# EAGLE board reference - MJ838 - rev.1b (EAGLE 9.6.2), part 1 of 2
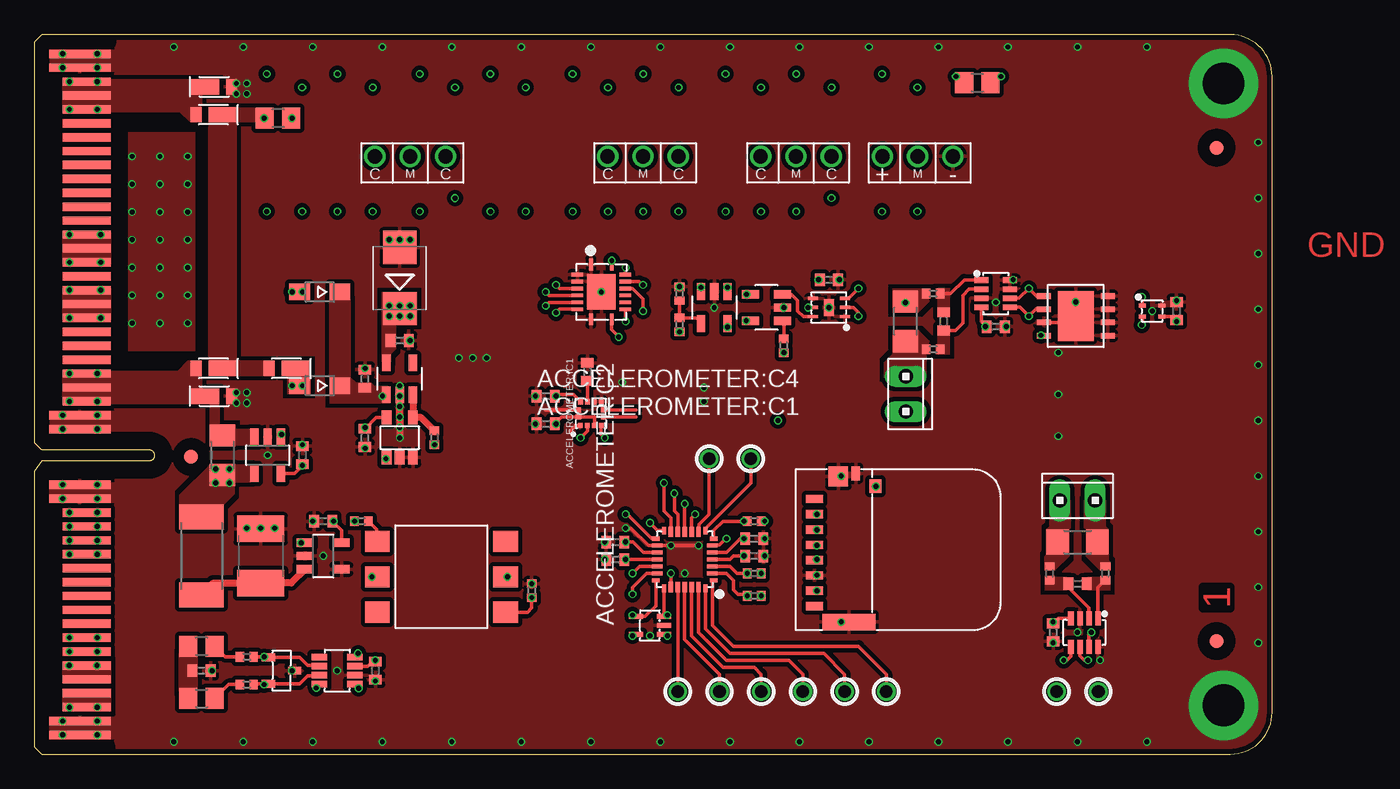
[diagram p0: board, top side]
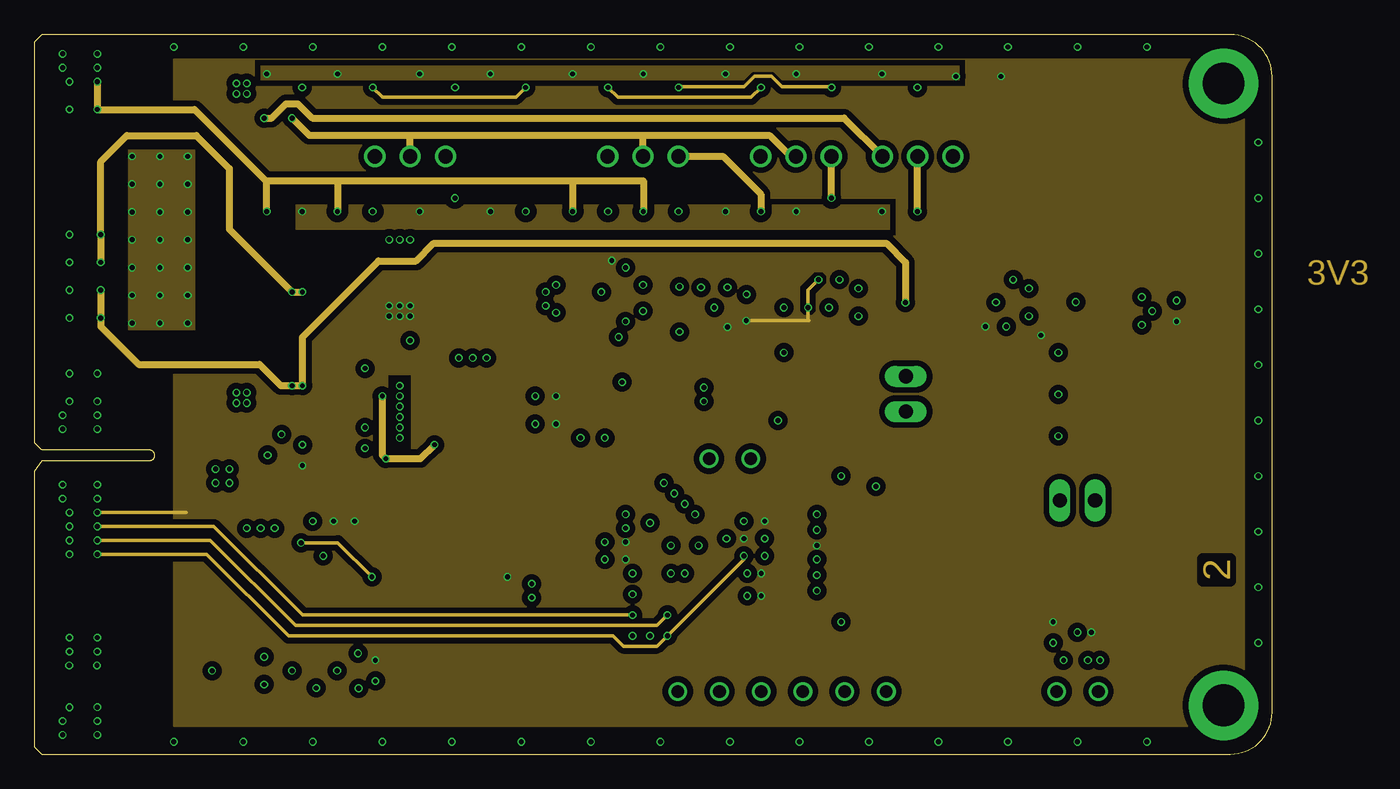
[diagram p1: board, inner layer Route2]
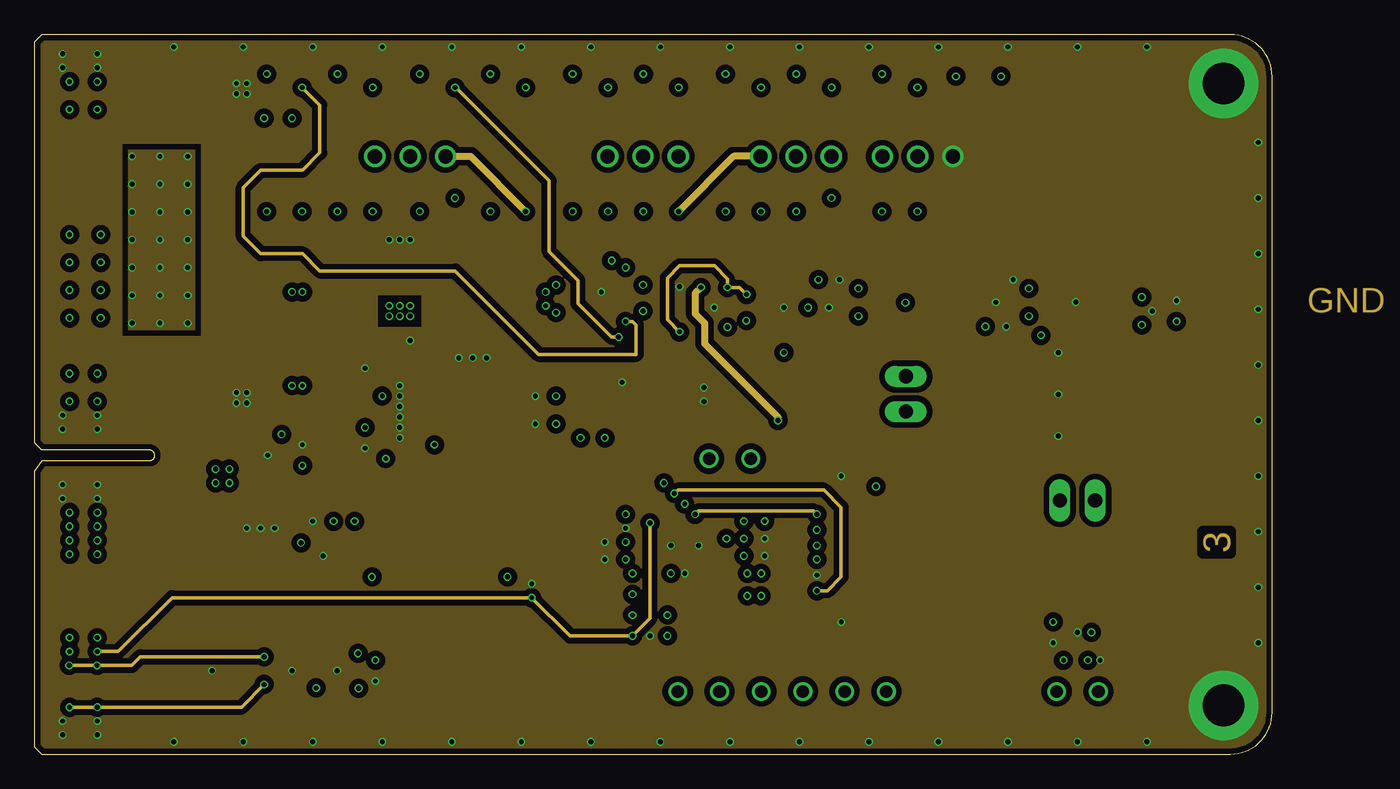
[diagram p2: board, inner layer Route3]
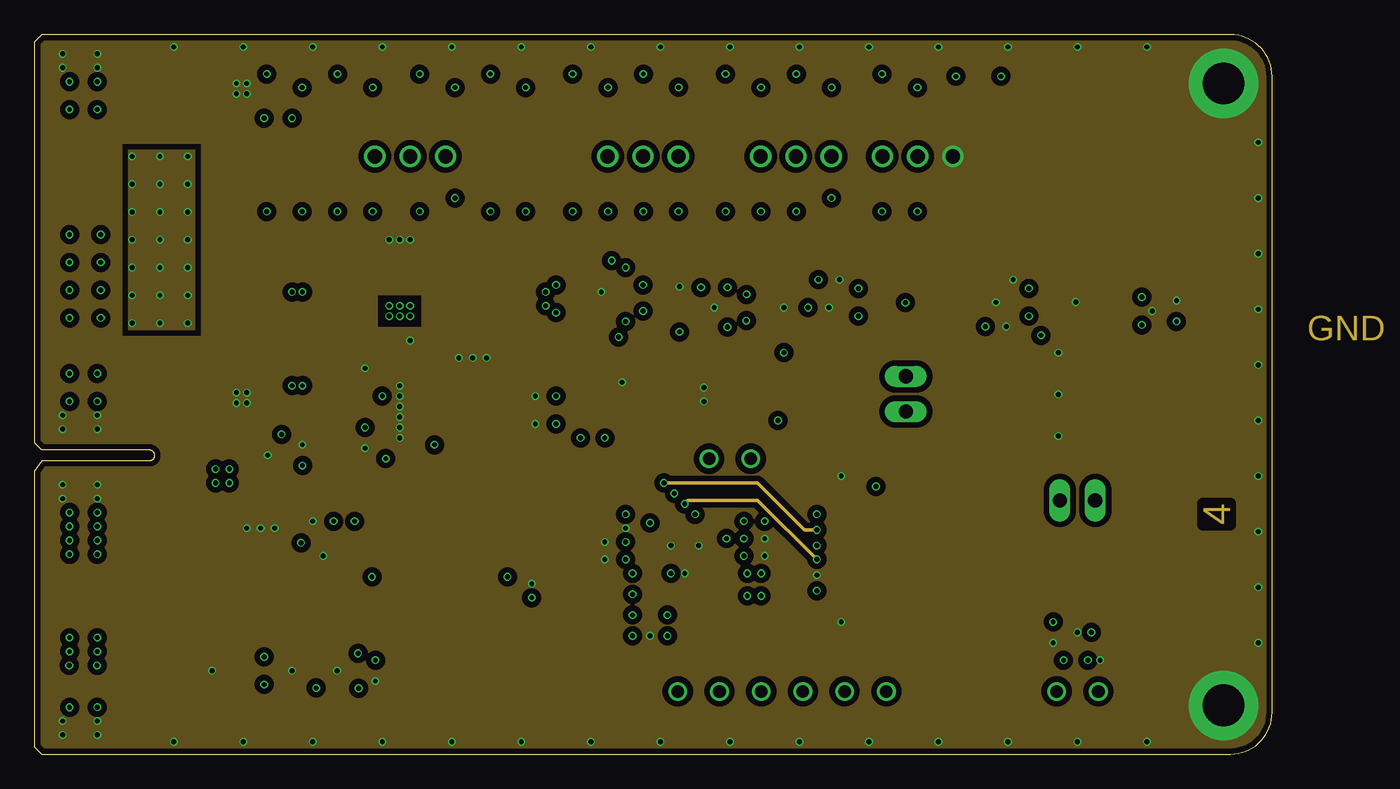
[diagram p3: board, inner layer Route14]
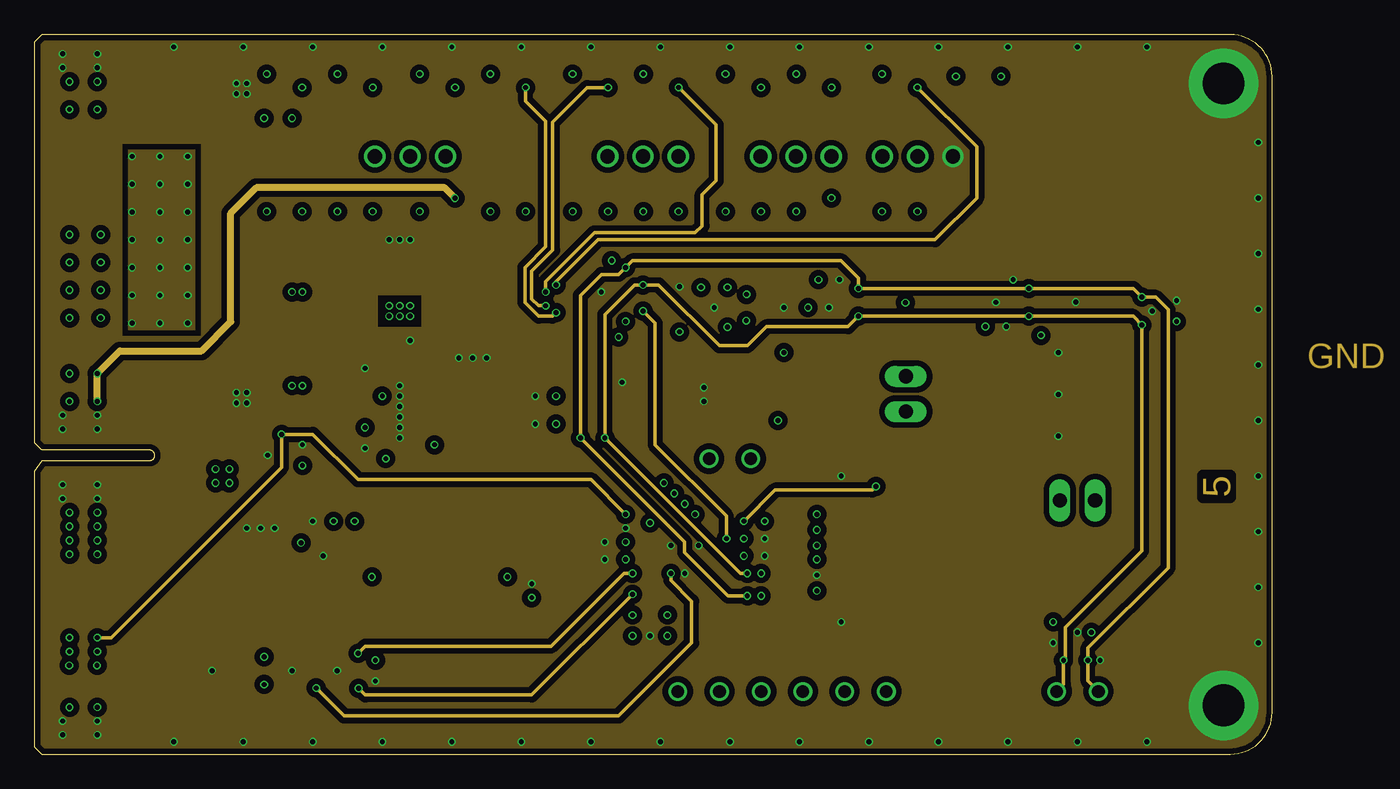
[diagram p4: board, inner layer Route15]
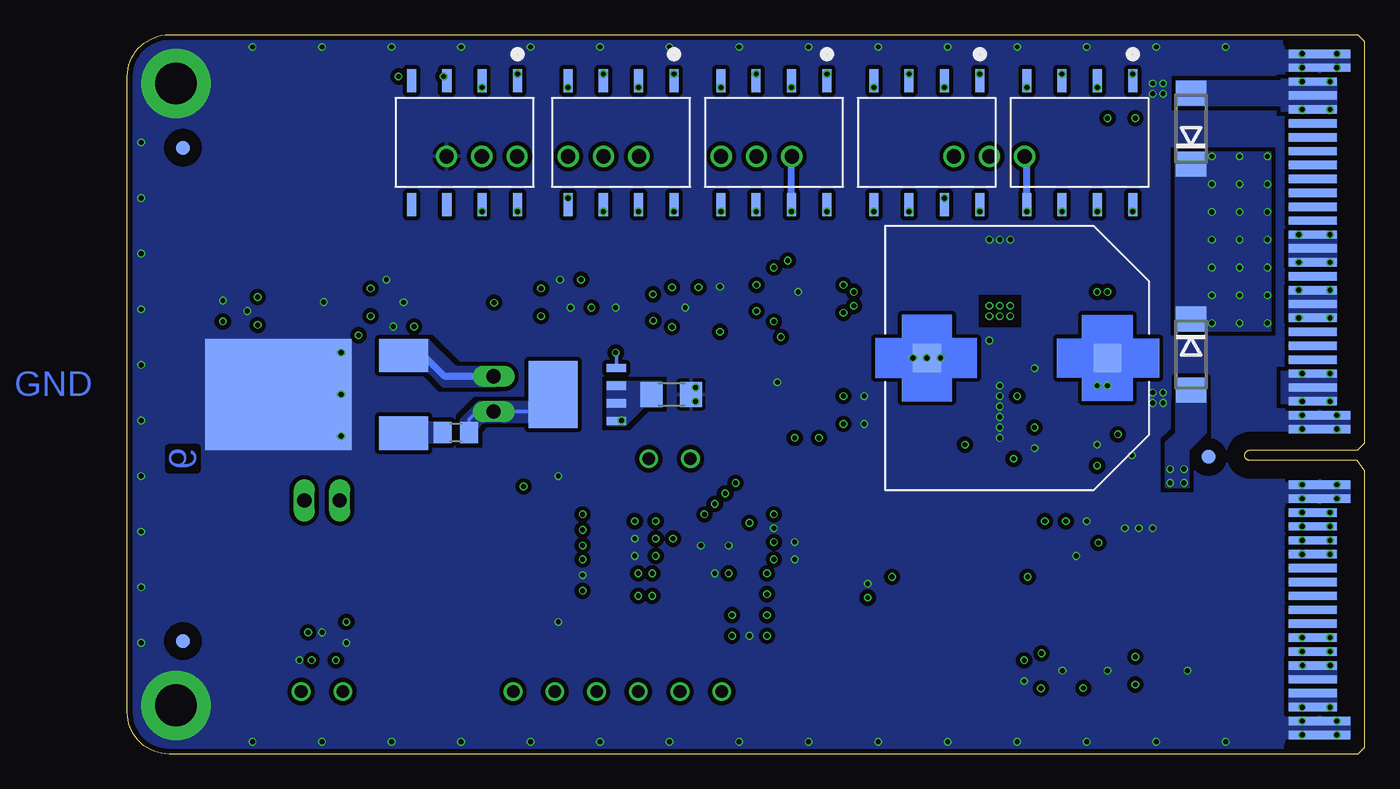
[diagram p5: board, bottom side, seen from below]

Size 89 x 51.75 mm. Coordinates in mm from the lower left corner, seen from the top.
Outline: 0.5,0 0,0.5 0,20.38 0.55,21.12 8.3,21.12 arc90 8.62,21.48 arc90 8.25,21.88 0.5,21.88 0,22.38 0,51.25 0.5,51.75 86,51.75 arc-90 89,48.75 89,3 arc-90 86,0 0.5,0
Copper layers (1*2*3*14*15*16): Top 0.0432mm / dielectric 0.1107mm / Route2 0.0175mm / dielectric 4mil / Route3 0.0175mm / dielectric 0.925575mm / Route14 0.0175mm / dielectric 4mil / Route15 0.0175mm / dielectric 0.1107mm / Bottom 0.0432mm
Design rules "oshpark-6layer": minimum track width 5mil, minimum drill 8mil, track to track 5mil, track to pad 5mil, pad to pad 5mil, via to via 5mil, smd to smd 5mil, copper to edge 15mil, drill to drill 6mil, minimum pad ring 4mil, minimum via ring 4mil, stop-mask expansion 1.5mil, vias tented up to drill 0mil, thermal gap 10mil
Net classes: 0 GND: width 0.25 mm, drill 0.35 mm, clearance 0.19 mm; 1 BAT+: width 0.5 mm, drill 0.35 mm, clearance 0.5 mm to class 0, clearance 0.5 mm; 2 signal: width 0.25 mm, drill 0.35 mm, clearance 0.19 mm to class 0, clearance 0.19 mm to class 1, clearance 0.19 mm; 3 3V3: width 0.25 mm, drill 0.35 mm, clearance 0.19 mm to class 0, clearance 0.19 mm to class 1, clearance 0.19 mm to class 2, clearance 0.19 mm; 4 Vdc: width 0.5 mm, drill 0.35 mm, clearance 0.5 mm to class 0, clearance 0.5 mm to class 1, clearance 0.5 mm to class 2, clearance 0.5 mm to class 3, clearance 0.5 mm; 5 Vdynamo: width 0.5 mm, drill 0.35 mm, clearance 0.5 mm to class 0, clearance 0.5 mm to class 1, clearance 0.5 mm to class 2, clearance 0.5 mm to class 3, clearance 0.5 mm to class 4, clearance 0.5 mm; 6 Vac: width 0.5 mm, drill 0.35 mm, clearance 0.5 mm to class 0, clearance 0.5 mm to class 1, clearance 0.5 mm to class 2, clearance 0.5 mm to class 3, clearance 0.5 mm to class 4, clearance 0.5 mm to class 5, clearance 0.5 mm

## Footprints (pad centres in the part's own frame; a part is rotated, then mirrored left to right if it is on the bottom)
C0402 = smd 0.7 x 0.9: 1 -0.65,0; 2 0.65,0
WSON-6 = smd 0.25 x 0.75: 1 -0.65,-1.15; 2 0,-1.15; 3 0.65,-1.15; 4 0.65,1.15; 5 0,1.15; 6 -0.65,1.15 | smd 1.2 x 0.75: 7 0,0
SOT-23-5 = smd 0.6 x 1.2: 1 0.95,1.15; 2 0,1.15; 3 -0.95,1.15; 4 -0.95,-1.15; 5 0.95,-1.15
SOT669 = smd 4.826 x 3.5: D 0,1.755 | smd 0.6 x 1.4: G 1.9,-2.8; S1 -1.91,-2.8; S2 -0.64,-2.8; S3 0.63,-2.8
10X02MTA = drill 1.016 long: 1 1.27,0; 2 -1.27,0
R0402 = smd 0.6 x 0.7: 1 -0.5,0; 2 0.5,0
R1206 = smd 1.6 x 1.803: 1 -1.422,0; 2 1.422,0
TO-263-2 = smd 2.4 x 3.5: 1 -2.8,1.75; 2 2.8,1.75 | smd 8 x 10.52: DIE 0,10.75
R0805 = smd 1.3 x 1.5: 1 -0.95,0; 2 0.95,0
LGA-12 = smd 0.39 x 0.33: 1_SCLK -0.863,0.755; 2_MOSI/SDA -0.863,0.255; 3_MISO/ASEL -0.863,-0.245; 4_!CS!/SCL -0.863,-0.745; 7_GND 0.858,-0.757; 8_ADC_IN 0.858,-0.258; 9_VREG_OUT 0.858,0.242; 10_VS 0.858,0.743 | smd 0.33 x 0.39: 5_INT1 -0.25,-0.912; 6_INT2 0.25,-0.912; 11_GND 0.25,0.91; 12_VDDIO -0.25,0.91
SOT23-8 = smd 0.45 x 1.1: P$1 -0.975,-1.275; P$2 -0.325,-1.275; P$3 0.325,-1.275; P$4 0.975,-1.275; P$5 0.975,1.275; P$6 0.325,1.275; P$7 -0.325,1.275; P$8 -0.975,1.275
SOT-23-3 = smd 0.56 x 0.95: 1 -0.95,-0.95; 2 0.95,-0.95; 3 0,0.95
SMD = smd 4.45 x 0.6: 1 0,24.5; 3 0,23.5; 35 0,7.5; 37 0,6.5; 45 0,2.5; 47 0,1.5; 97 0,-23.5; 99 0,-24.5 | smd 4.45 x 0.6 bottom: 2 0,24.5; 4 0,23.5; 36 0,7.5; 38 0,6.5; 46 0,2.5; 48 0,1.5; 98 0,-23.5; 100 0,-24.5 | smd 3.45 x 0.6: 5 0.5,22.5; 7 0.5,21.5; 9 0.5,20.5; 11 0.5,19.5; 13 0.5,18.5; 15 0.5,17.5; 17 0.5,16.5; 19 0.5,15.5; 21 0.5,14.5; 23 0.5,13.5; 25 0.5,12.5; 27 0.5,11.5; 29 0.5,10.5; 31 0.5,9.5; 33 0.5,8.5; 49 0.5,0.5; 51 0.5,-0.5; 53 0.5,-1.5; 55 0.5,-2.5; 57 0.5,-3.5; 59 0.5,-4.5; 61 0.5,-5.5; 63 0.5,-6.5; 65 0.5,-7.5; 67 0.5,-8.5; 69 0.5,-9.5; 71 0.5,-10.5; 73 0.5,-11.5; 75 0.5,-12.5; 77 0.5,-13.5; 79 0.5,-14.5; 81 0.5,-15.5; 83 0.5,-16.5; 85 0.5,-17.5; 87 0.5,-18.5; 89 0.5,-19.5; 91 0.5,-20.5; 93 0.5,-21.5; 95 0.5,-22.5 | smd 3.45 x 0.6 bottom: 6 0.5,22.5; 8 0.5,21.5; 10 0.5,20.5; 12 0.5,19.5; 14 0.5,18.5; 16 0.5,17.5; 18 0.5,16.5; 20 0.5,15.5; 22 0.5,14.5; 24 0.5,13.5; 26 0.5,12.5; 28 0.5,11.5; 30 0.5,10.5; 32 0.5,9.5; 34 0.5,8.5; 50 0.5,0.5; 52 0.5,-0.5; 54 0.5,-1.5; 56 0.5,-2.5; 58 0.5,-3.5; 60 0.5,-4.5; 62 0.5,-5.5; 64 0.5,-6.5; 66 0.5,-7.5; 68 0.5,-8.5; 70 0.5,-9.5; 72 0.5,-10.5; 74 0.5,-11.5; 76 0.5,-12.5; 78 0.5,-13.5; 80 0.5,-14.5; 82 0.5,-15.5; 84 0.5,-16.5; 86 0.5,-17.5; 88 0.5,-18.5; 90 0.5,-19.5; 92 0.5,-20.5; 94 0.5,-21.5; 96 0.5,-22.5
SMB = smd 2.4 x 2.4: A 2.2,0; C -2.2,0
DFN8 = smd 1 x 0.4: 1 -2.3,1.425; 2 -2.3,0.475; 3 -2.3,-0.475; 4 -2.3,-1.425; 5 2.3,-1.425; 6 2.3,-0.475; 7 2.3,0.475; 8 2.3,1.425 | smd 2.6 x 3.6: G 0,0
FIDUCIAL_1MM = smd 1 x 1: 1 0,0
SMD' = smd 0.5 x 0.3: SCL -0.7,-0.4; SDA -0.7,0.4; VDD 0.7,-0.4; VSS 0.7,0.4
SOT323-5 = smd 1 x 0.35: GND -1,0; I1 -1,0.65; I2 -1,-0.65; I3 1,-0.65; I4 1,0.65
SOT-23-8 = smd 1 x 0.4: P$1 -1.025,0.975; P$2 -1.025,0.325; P$3 -1.025,-0.325; P$4 -1.025,-0.975; P$5 1.025,-0.975; P$6 1.025,-0.325; P$7 1.025,0.325; P$8 1.025,0.975
SOT23-5 = smd 0.7 x 1: 1_VDD -0.95,-1.4; 2_GND 0,-1.4; 3_GND 0.95,-1.4; 4_DOUT 0.95,1.45; 5_CD -0.95,1.45
SOT-23-5L = smd 0.6 x 1.2: ADJ/NC -0.95,-1.15; EN -0.95,1.15; GND 0,1.15; IN 0.95,1.15; OUT 0.95,-1.15
SOD323-W = smd 1.5 x 1.2: A 1.45,0; C -1.45,0
US2H = smd 2 x 1.1: A -1,0 | smd 0.8 x 1.1: C 0.9,0
TH-2S = drill 1.016: 1_POS -2.54,0; 2_MID 0,0; 3_NEG 2.54,0
SMD_DIP8 = smd 0.65 x 1.65: 1_ANODE1 -3.81,-4.44; 2_CATHODE1 -1.27,-4.44; 3_ANODE2 1.27,-4.44; 4_CATHODE2 3.81,-4.44; 5_DRAIN2-1 3.81,4.48; 6_DRAIN2-2 1.27,4.48; 7_DRAIN1-1 -1.27,4.48; 8_DRAIN1-2 -3.81,4.48
VQFN16 = smd 0.85 x 0.28: 1 -1.975,-0.75; 8 1.975,-0.75; 9 1.975,0.75; 16 -1.975,0.75 | smd 0.28 x 0.85: 2 -1.25,-1.725; 3 -0.75,-1.725; 4 -0.25,-1.725; 5 0.25,-1.725; 6 0.75,-1.725; 7 1.25,-1.725; 10 1.25,1.725; 11 0.75,1.725; 12 0.25,1.725; 13 -0.25,1.725; 14 -0.75,1.725; 15 -1.25,1.725 | smd 2.55 x 2.05: 17 0,0
TH-2S-BACK-TO-BACK = drill 1.016: 1_C -2.54,0; 2_MID 0,0; 3_C 2.54,0
DO214AA = smd 1.8 x 2.2: A 2.55,0; C -2.55,0
SOT23-5' = smd 0.6 x 1.2: 1 -0.95,-1.306; 2 0,-1.306; 3 0.95,-1.306; 4 0.95,1.306; 5 -0.95,1.306
CAP_EEEFK1E472SV = smd 2 x 2: + -6.5,0; - 6.5,0
C1812 = smd 1.9 x 3.4: 1 -1.95,0; 2 1.95,0
SMD-6 = smd 1.78 x 1.52: 1 -4.61,2.54; 2 -4.61,0; 3 -4.61,-2.54; 4 4.61,-2.54; 5 4.61,0; 6 4.61,2.54
R2512 = smd 1.8 x 3.2: 1 -2.8,0; 2 2.8,0
MICRO_SD_CONNECTOR = smd 0.6 x 1.25: CD/DAT3 2.75,-1.33; CLK -0.55,-1.33; CMD 1.65,-1.33; DAT0 -2.75,-1.33; DAT1 -3.85,-1.33; DAT2 3.85,-1.33; GND3 -1.65,-1.33; VDD 0.55,-1.33 | smd 0.95 x 0.85: DET 4.775,-5.723 | smd 1.2 x 3.79: GND1 -5,-3.81 | smd 1.45 x 1.4: GND2 5.475,-3.05 | smd 1 x 0.6: POL 5.7,-4.3
UFQFPN-28 = smd 0.55 x 0.3: 1_PB8 -2.08,1.5; 7_PA1 -2.08,-1.5; 15_PB1 2.08,-1.5; 21_PA13 2.08,1.5 | smd 0.75 x 0.3: 2_PF0 -1.98,1; 3_PF1 -1.98,0.5; 4_NRST -1.98,0; 5_VDDA -1.98,-0.5; 6_PA0 -1.98,-1; 16_VSS 1.98,-1; 17_VDD 1.98,-0.5; 18_VDDIO2 1.98,0; 19_PA9-[PA11] 1.98,0.5; 20_PA10-[PA12] 1.98,1 | smd 0.3 x 0.55: 8_PA2 -1.5,-2.08; 14_PB0 1.5,-2.08; 22_PA14 1.5,2.08; 28_PB7 -1.5,2.08 | smd 0.3 x 0.75: 9_PA3 -1,-1.98; 10_PA4 -0.5,-1.98; 11_PA5 0,-1.98; 12_PA6 0.5,-1.98; 13_PA7 1,-1.98; 23_PA15 1,1.98; 24_PB3 0.5,1.98; 25_PB4 0,1.98; 26_PB5 -0.5,1.98; 27_PB6 -1,1.98
TH-0.9 = drill 0.9: P$1 0,0

## Placement (x,y rotation side)
12R_OHMIC_LOAD:C1  0.1uF / 10V  [C0402]  57.12,34.12 180 top
12R_OHMIC_LOAD:IC1  DAC121C081CISD/NOPB  [WSON-6]  57.12,32.12 90 top
12R_OHMIC_LOAD:IC2  AD8515ARTZ-REEL7  [SOT-23-5]  52.62,32.12 270 top
12R_OHMIC_LOAD:IC3  PH2925U,115  [SOT669]  56.62,25.88 90 bottom
12R_OHMIC_LOAD:IC4  AD8515ARTZ-REEL7  [SOT-23-5]  48.88,32.12 0 top
12R_OHMIC_LOAD:J3  Application  [10X02MTA]  62.65,25.91 270 top
12R_OHMIC_LOAD:R1  3k  [R0402]  46.38,33.12 270 top
12R_OHMIC_LOAD:R2  0.1R / 0.5W - LVK12R100CER  [R1206]  49.88,25.88 180 bottom
12R_OHMIC_LOAD:R3  1k  [R0402]  53.88,29.38 270 top
12R_OHMIC_LOAD:R4  27k  [R0402]  46.38,30.88 270 top
12R_OHMIC_LOAD:R5  12R, 20W, AP725 12R F  [TO-263-2]  67.38,25.88 90 bottom
12R_OHMIC_LOAD:R6  0  [R0805]  65.38,23.12 180 bottom
ACCELEROMETER:C1  0.1uF / 10V  [C0402]  36.75,23.75 0 top
ACCELEROMETER:C2  0.2uF / 10V  [C0402]  39.75,27.5 270 top
ACCELEROMETER:C4  0.11uF / 10V  [C0402]  36.75,25.75 0 top
ACCELEROMETER:IC1  ADXL367BCCZ-RL7  [LGA-12]  40,24.5 90 top
CAN_INFRA:C1  47nF / 10V  [C0402]  12,6 0 top
CAN_INFRA:C5  0.1uF / 10V  [C0402]  24.5,6 270 top
CAN_INFRA:IC1  TCAN334GDCNT  [SOT23-8]  21.75,6 90 top
CAN_INFRA:IC2  SZNUP2105LT1G  [SOT-23-3]  17.75,6 270 top
CAN_INFRA:R1  60R, 0.5W  [R0805]  12,7.75 180 top
CAN_INFRA:R2  60R, 0.5W  [R0805]  12,4 0 top
CAN_INFRA:R3  0  [R0402]  15.25,5 0 top
CAN_INFRA:R4  0  [R0402]  15.25,7 0 top
CONN1  MEC1-150-02-F-D-RA1-SL  [SMD]  3.25,25.88 180 bottom
D1  SMLVT3V3  [SMB]  26.25,34.25 90 top
FE-RAM:IC1  FM24CL64B-DGTR  [DFN8]  74.88,31.52 180 top
FID1  n/a  [FIDUCIAL_1MM]  11.25,21.38 180 top
FID2  n/a  [FIDUCIAL_1MM]  85,8.12 0 bottom
FID3  n/a  [FIDUCIAL_1MM]  85,8.12 180 top
FID4  n/a  [FIDUCIAL_1MM]  11.25,21.38 0 bottom
FID5  n/a  [FIDUCIAL_1MM]  85,43.62 180 top
FID6  n/a  [FIDUCIAL_1MM]  85,43.62 0 bottom
HUMIDITY_SENSOR:C5  0.1uF / 10V  [C0402]  82.12,31.88 90 top
HUMIDITY_SENSOR:IC1  SHT40-AD1F-R2  [SMD']  80.38,31.88 0 top
IC1  ESDALC6V1W5  [SOT323-5]  44.25,9.25 180 top
INA1:C1  0.1uF / 10V  [C0402]  73.25,8.75 270 top
INA1:C2  ???  [C0402]  75,12.25 180 top
INA1:IC3  INA219BIDCNT  [SOT-23-8]  75.5,8.75 270 top
INA1:R3  ???  [R0402]  73,13 90 top
INA1:R4  0.1R / 0.5W - LVK12R100CER  [R1206]  75,15.25 180 top
INA1:R5  ???  [R0402]  77,13 90 top
INA219:C1  0.1uF / 10V  [C0402]  69.12,30.75 0 top
INA219:C2  ???  [C0402]  65.38,31.12 270 top
INA219:IC3  INA219BIDCNT  [SOT-23-8]  69.12,33.12 0 top
INA219:R3  ???  [R0402]  64.62,29.12 180 top
INA219:R4  0.1R / 0.5W - LVK12R100CER  [R1206]  62.62,31.12 270 top
INA219:R5  ???  [R0402]  64.62,33.12 180 top
J1  sense 1  [10X02MTA]  75,18.25 0 top
MARKER1  6 layer  [6L]  85,10.25 90 top
RECTIFIER:3V3:C1  1uF / 10V  [C0402]  23.75,22.75 270 top
RECTIFIER:3V3:C2  1uF / 10V  [C0402]  23.75,27 90 top
RECTIFIER:3V3:C7  1uF / 10V  [C0402]  26.25,29.75 180 top
RECTIFIER:3V3:IC1  R3119N058A  [SOT23-5]  26.25,22.75 0 top
RECTIFIER:3V3:IC2  LDK320AM33R  [SOT-23-5L]  26.25,27 180 top
RECTIFIER:3V3:R1  100k / 0.1W  [R0402]  28.75,22.75 90 top
RECTIFIER:D1  BAT 60A E6327  [SOD323-W]  20.5,33.25 180 top
RECTIFIER:D2  BAT 60A E6327  [SOD323-W]  20.5,26.5 180 top
RECTIFIER:GRAETZ+DELON:D1  CUHS20S30,H3F  [US2H]  12.5,46 180 top
RECTIFIER:GRAETZ+DELON:D2  CUHS20S30,H3F  [US2H]  13.25,48 0 top
RECTIFIER:GRAETZ+DELON:D3  CUHS20S30,H3F  [US2H]  12.5,27.75 180 top
RECTIFIER:GRAETZ+DELON:D4  CUHS20S30,H3F  [US2H]  13.25,25.75 0 top
RECTIFIER:GRAETZ+DELON:DELON:C1  330μF / 35V / ultralow ESR  [TH-2S]  63.5,43 0 top
RECTIFIER:GRAETZ+DELON:DELON:SSR_NO/NO3:IC1  LAA710S  [SMD_DIP8]  64.75,44 180 bottom
RECTIFIER:GRAETZ+DELON:IC1  TLC59208FIRGYR  [VQFN16]  40.75,33.25 270 top
RECTIFIER:GRAETZ+DELON:R1  625  [R0805]  67.8,48.3 0 top
RECTIFIER:GRAETZ+DELON:TUNING_CAPS:C2  1500μF / 35V / ultralow ESR  [TH-2S-BACK-TO-BACK]  27,43 0 top
RECTIFIER:GRAETZ+DELON:TUNING_CAPS:C3  1500μF / 35V / ultralow ESR  [TH-2S-BACK-TO-BACK]  43.75,43 0 top
RECTIFIER:GRAETZ+DELON:TUNING_CAPS:C4  1500μF / 35V / ultralow ESR  [TH-2S-BACK-TO-BACK]  54.75,43 0 top
RECTIFIER:GRAETZ+DELON:TUNING_CAPS:R2  47k  [R0805]  17.5,45.75 180 top
RECTIFIER:GRAETZ+DELON:TUNING_CAPS:SSR_NO/NO1:IC1  LAA710S  [SMD_DIP8]  42.5,44 180 bottom
RECTIFIER:GRAETZ+DELON:TUNING_CAPS:SSR_NO/NO2:IC1  LAA710S  [SMD_DIP8]  53.5,44 180 bottom
RECTIFIER:GRAETZ+DELON:TUNING_CAPS:SSR_NO/NO3:IC1  LAA710S  [SMD_DIP8]  20.5,44 180 bottom
RECTIFIER:GRAETZ+DELON:TUNING_CAPS:SSR_NO/NO4:IC1  LAA710S  [SMD_DIP8]  31.5,44 180 bottom
RECTIFIER:OVP:D1  19V/5W  [DO214AA]  12.5,45 90 bottom
RECTIFIER:OVP:D2  19V/5W  [DO214AA]  12.5,28.75 270 bottom
RECTIFIER:PHASE_SHIFT:C1  0.1uF / 10V  [C0402]  19.25,21.5 270 top
RECTIFIER:PHASE_SHIFT:IC1  LT1716CS5#TRMPBF  [SOT23-5']  16.75,21.5 180 top
RECTIFIER:PHASE_SHIFT:R4  0.01R / 0.5W / 0.25%  [R1206]  13.5,21.5 90 top
RECTIFIER:SMOOTHING_CAP:C1  EEE-FK1E472SV  [CAP_EEEFK1E472SV]  25,28.5 180 bottom
RECTIFIER:SMOOTHING_CAP:D8  CUHS20S30,H3F  [US2H]  17.75,27.75 180 top
RECTIFIER:ZERO-CROSS_DETECTOR:C3  0.1uF / 10V  [C0402]  20.75,16.75 0 top
RECTIFIER:ZERO-CROSS_DETECTOR:C8  10nF / 100v  [C1812]  16.25,14.25 270 top
RECTIFIER:ZERO-CROSS_DETECTOR:IC1  4N25-X009T  [SMD-6]  29.25,12.75 0 top
RECTIFIER:ZERO-CROSS_DETECTOR:IC3  LT1716CS5#TRMPBF  [SOT23-5']  20.75,14.25 270 top
RECTIFIER:ZERO-CROSS_DETECTOR:R1  10k/3W  [R2512]  12,14.25 270 top
RECTIFIER:ZERO-CROSS_DETECTOR:R2  100R  [R0402]  23.5,16.75 180 top
RECTIFIER:ZERO-CROSS_DETECTOR:R3  10k  [R0402]  35.75,11.75 270 top
SD_CARD:IC2  47309-2651  [MICRO_SD_CONNECTOR]  54.75,14.5 90 top
SD_CARD:R1  10k  [R0402]  51.75,16.75 0 top
STM32F04:C1  0.1uF / 10V  [C0402]  41.75,15.25 0 top
STM32F04:C4  1uF / 10V  [C0402]  51.75,15.5 180 top
STM32F04:C5  0.1uF / 10V  [C0402]  41.75,14 0 top
STM32F04:C7  0.1uF / 10V  [C0402]  51.75,14.25 180 top
STM32F04:IC2  STM32F042G6U6  [UFQFPN-28]  46.75,14 180 top
STM32F04:R1  1k  [R0402]  51.75,11.38 0 top
STM32F04:R2  1k  [R0402]  51.75,13 0 top
TP1  CAN high  [TH-0.9]  51.5,21.25 270 top
TP2  CAN high  [TH-0.9]  48.5,21.25 270 top
TP3  CAN high  [TH-0.9]  46.25,4.5 0 top
TP4  CAN high  [TH-0.9]  49.25,4.5 0 top
TP5  CAN high  [TH-0.9]  52.25,4.5 0 top
TP6  CAN high  [TH-0.9]  55.25,4.5 0 top
TP7  CAN high  [TH-0.9]  58.25,4.5 0 top
TP8  CAN high  [TH-0.9]  61.25,4.5 0 top
TP9  CAN high  [TH-0.9]  73.5,4.5 0 top
TP10  CAN high  [TH-0.9]  76.5,4.5 0 top

## Library data of the parts
12R_OHMIC_LOAD:C1 ACCELEROMETER:C1 ACCELEROMETER:C2 ACCELEROMETER:C4 CAN_INFRA:C1 CAN_INFRA:C5 HUMIDITY_SENSOR:C5 INA1:C1 INA1:C2 INA219:C1 INA219:C2 RECTIFIER:3V3:C1 RECTIFIER:3V3:C2 RECTIFIER:3V3:C7 RECTIFIER:PHASE_SHIFT:C1 RECTIFIER:ZERO-CROSS_DETECTOR:C3 RECTIFIER:ZERO-CROSS_DETECTOR:C8 STM32F04:C1 STM32F04:C4 STM32F04:C5 STM32F04:C7 = rcl; SPICEPREFIX: C
12R_OHMIC_LOAD:IC1 = DA121C081 - 12bit I2C DAC
12R_OHMIC_LOAD:IC2 12R_OHMIC_LOAD:IC4 = AD8515 - R2R IO OpAmp
12R_OHMIC_LOAD:IC3 = PH2925U - N-Fet
12R_OHMIC_LOAD:J3 J1 = con-amp
12R_OHMIC_LOAD:R1-12R_OHMIC_LOAD:R4 12R_OHMIC_LOAD:R6 CAN_INFRA:R1-CAN_INFRA:R4 INA1:R3-INA1:R5 INA219:R3-INA219:R5 RECTIFIER:3V3:R1 RECTIFIER:GRAETZ+DELON:R1 RECTIFIER:GRAETZ+DELON:TUNING_CAPS:R2 RECTIFIER:PHASE_SHIFT:R4 RECTIFIER:ZERO-CROSS_DETECTOR:R1-RECTIFIER:ZERO-CROSS_DETECTOR:R3 SD_CARD:R1 STM32F04:R1 STM32F04:R2 = rcl; SPICEPREFIX: R
12R_OHMIC_LOAD:R5 = AP725 12R F - 12R 20W Resistor
ACCELEROMETER:IC1 = ADXL367 - Accelerometer
CAN_INFRA:IC1 = TCAN33x - 3.3V CAN Transciever
CAN_INFRA:IC2 = NUP2105L - 27V ESD Protection Diode
CONN1 = Samtec MEC1 - Card Edge Connector
D1 RECTIFIER:D1 RECTIFIER:D2 RECTIFIER:OVP:D1 RECTIFIER:OVP:D2 = diode
FE-RAM:IC1 = FM24CL64B - 64kb I2C FeRAM
FID1-FID6 = fiducials
HUMIDITY_SENSOR:IC1 = SHT40-AD1F - Humidity Sensor
IC1 = ESDALCx - 4c ESD protection
INA1:IC3 INA219:IC3 = INA219 - I2C Current & Power Monitor
MARKER1 = Layer Markers
RECTIFIER:3V3:IC1 = R3119x - Input Voltage Detector
RECTIFIER:3V3:IC2 = LDK320 5V LDO
RECTIFIER:GRAETZ+DELON:D1-RECTIFIER:GRAETZ+DELON:D4 RECTIFIER:SMOOTHING_CAP:D8 = CUHS20S30 - Schottky Barrier Diode
RECTIFIER:GRAETZ+DELON:DELON:C1 RECTIFIER:GRAETZ+DELON:TUNING_CAPS:C2-RECTIFIER:GRAETZ+DELON:TUNING_CAPS:C4 = C-Pol
RECTIFIER:GRAETZ+DELON:DELON:SSR_NO/NO3:IC1 RECTIFIER:GRAETZ+DELON:TUNING_CAPS:SSR_NO/NO1:IC1 RECTIFIER:GRAETZ+DELON:TUNING_CAPS:SSR_NO/NO2:IC1 RECTIFIER:GRAETZ+DELON:TUNING_CAPS:SSR_NO/NO3:IC1 RECTIFIER:GRAETZ+DELON:TUNING_CAPS:SSR_NO/NO4:IC1 = LxA710 - Solid State Relay Form A-AB
RECTIFIER:GRAETZ+DELON:IC1 = TLC59208F - LED Driver
RECTIFIER:PHASE_SHIFT:IC1 RECTIFIER:ZERO-CROSS_DETECTOR:IC3 = linear
RECTIFIER:SMOOTHING_CAP:C1 = EEEFK1E472SV; AVAILABILITY: In Stock; CHECK_PRICES: https://www.snapeda.com/parts/EEE-FK1E472SV/Panasonic/view-part/?ref=eda; DESCRIPTION: Cap Aluminum Lytic 4700uF 25V 20% (18 X 21.5mm) SMD 2640mA 5000h 105C Automotive T/R; MF: Panasonic Electronic; MP: EEE-FK1E472SV; PACKAGE: RADIAL-2 Panasonic; PRICE: None; SNAPEDA_LINK: https://www.snapeda.com/parts/EEE-FK1E472SV/Panasonic/view-part/?ref=snap
RECTIFIER:ZERO-CROSS_DETECTOR:IC1 = 4N25 - OpoCoupler
SD_CARD:IC2 = Molex SD-47309 SD Card Slot
STM32F04:IC2 = STM32F042G6
TP1-TP10 = signal testpoint

## Nets
2IN+ [signal]: INA1:R4.1 INA1:R5.2 J1.1
2IN- [signal]: INA1:R3.2 INA1:R4.2 J1.2
3V3 [3V3]: 12R_OHMIC_LOAD:C1.2 12R_OHMIC_LOAD:IC1.5 12R_OHMIC_LOAD:IC2.5 12R_OHMIC_LOAD:IC4.5 ACCELEROMETER:C1.2 ACCELEROMETER:C4.2 ACCELEROMETER:IC1.3_MISO/ASEL ACCELEROMETER:IC1.10_VS ACCELEROMETER:IC1.12_VDDIO CAN_INFRA:C5.1 CAN_INFRA:IC1.P$3 CONN1.33 CONN1.34 D1.C FE-RAM:IC1.8 HUMIDITY_SENSOR:C5.1 HUMIDITY_SENSOR:IC1.VDD INA1:C1.1 INA1:IC3.P$4 INA1:IC3.P$7 INA219:C1.1 INA219:IC3.P$4 RECTIFIER:3V3:C7.2 RECTIFIER:3V3:IC2.OUT RECTIFIER:GRAETZ+DELON:IC1.16 RECTIFIER:GRAETZ+DELON:R1.2 RECTIFIER:PHASE_SHIFT:C1.2 RECTIFIER:PHASE_SHIFT:IC1.5 RECTIFIER:ZERO-CROSS_DETECTOR:C3.2 RECTIFIER:ZERO-CROSS_DETECTOR:IC1.5 RECTIFIER:ZERO-CROSS_DETECTOR:IC3.5 RECTIFIER:ZERO-CROSS_DETECTOR:R2.2 SD_CARD:IC2.VDD SD_CARD:R1.2 STM32F04:C1.2 STM32F04:C4.2 STM32F04:C5.2 STM32F04:IC2.5_VDDA STM32F04:IC2.17_VDD STM32F04:IC2.18_VDDIO2 STM32F04:R1.2 STM32F04:R2.2
12R_OHMIC_LOAD:DAC_OUT [signal]: 12R_OHMIC_LOAD:IC1.6 12R_OHMIC_LOAD:IC2.3
12R_OHMIC_LOAD:DRAIN: 12R_OHMIC_LOAD:IC3.D 12R_OHMIC_LOAD:J3.1 12R_OHMIC_LOAD:R6.1
12R_OHMIC_LOAD:GATE1: 12R_OHMIC_LOAD:IC3.G 12R_OHMIC_LOAD:R3.2
12R_OHMIC_LOAD:GATE-DRIVER_OUT [signal]: 12R_OHMIC_LOAD:IC2.1 12R_OHMIC_LOAD:R3.1
12R_OHMIC_LOAD:LOAD_LOW: 12R_OHMIC_LOAD:R5.1 12R_OHMIC_LOAD:R6.2
12R_OHMIC_LOAD:N$1 [signal]: 12R_OHMIC_LOAD:IC4.4 12R_OHMIC_LOAD:R1.2 12R_OHMIC_LOAD:R4.1
12R_OHMIC_LOAD:VSENSE [Vdc]: 12R_OHMIC_LOAD:IC3.S1 12R_OHMIC_LOAD:IC3.S2 12R_OHMIC_LOAD:IC3.S3 12R_OHMIC_LOAD:IC4.3 12R_OHMIC_LOAD:R2.2
12R_OHMIC_LOAD:VSENSE-AMP_OUT [signal]: 12R_OHMIC_LOAD:IC2.4 12R_OHMIC_LOAD:IC4.1 12R_OHMIC_LOAD:R4.2
!LED_RST! [signal]: RECTIFIER:GRAETZ+DELON:IC1.13 STM32F04:IC2.6_PA0
!STBY! [signal]: CAN_INFRA:IC1.P$8 STM32F04:IC2.23_PA15
ACCELEROMETER:VREG: ACCELEROMETER:C2.2 ACCELEROMETER:IC1.9_VREG_OUT
ADJ_LOAD_HIGH [Vdc]: 12R_OHMIC_LOAD:J3.2 12R_OHMIC_LOAD:R5.2 INA219:R3.2 INA219:R4.2
ADXL_INT1 [signal]: ACCELEROMETER:IC1.5_INT1
ADXL_INT2 [signal]: ACCELEROMETER:IC1.6_INT2
BAT+ [BAT+]: CONN1.69 CONN1.70 CONN1.71 CONN1.72 CONN1.73 CONN1.74 RECTIFIER:D1.A
CAN_H [signal]: CAN_INFRA:IC1.P$7 CAN_INFRA:IC2.2 CAN_INFRA:R3.2 CONN1.5 CONN1.6 CONN1.7 CONN1.8
CAN_INFRA:H [signal]: CAN_INFRA:R2.2 CAN_INFRA:R3.1
CAN_INFRA:L [signal]: CAN_INFRA:R1.1 CAN_INFRA:R4.1
CAN_INFRA:SPLIT [signal]: CAN_INFRA:C1.1 CAN_INFRA:R1.2 CAN_INFRA:R2.1
CAN_L [signal]: CAN_INFRA:IC1.P$6 CAN_INFRA:IC2.1 CAN_INFRA:R4.2 CONN1.9 CONN1.10 CONN1.11 CONN1.12
CAN_RX [signal]: CAN_INFRA:IC1.P$4 STM32F04:IC2.19_PA9-[PA11]
CAN_TX [signal]: CAN_INFRA:IC1.P$1 STM32F04:IC2.20_PA10-[PA12]
CLK: SD_CARD:IC2.CLK STM32F04:IC2.11_PA5
CS: SD_CARD:IC2.CD/DAT3 STM32F04:IC2.10_PA4
DET: SD_CARD:IC2.DET SD_CARD:R1.1 STM32F04:IC2.7_PA1
DYNAMO1 [Vdynamo]: CONN1.91 CONN1.92 CONN1.93 CONN1.94 CONN1.95 CONN1.96 RECTIFIER:GRAETZ+DELON:D1.C RECTIFIER:GRAETZ+DELON:D2.A RECTIFIER:GRAETZ+DELON:TUNING_CAPS:SSR_NO/NO1:IC1.6_DRAIN2-2 RECTIFIER:GRAETZ+DELON:TUNING_CAPS:SSR_NO/NO1:IC1.8_DRAIN1-2 RECTIFIER:GRAETZ+DELON:TUNING_CAPS:SSR_NO/NO3:IC1.6_DRAIN2-2 RECTIFIER:GRAETZ+DELON:TUNING_CAPS:SSR_NO/NO3:IC1.8_DRAIN1-2 RECTIFIER:OVP:D1.A
DYNAMO2 [Vdynamo]: CONN1.49 CONN1.50 CONN1.51 CONN1.52 CONN1.53 CONN1.54 RECTIFIER:GRAETZ+DELON:D3.C RECTIFIER:GRAETZ+DELON:D4.A RECTIFIER:GRAETZ+DELON:TUNING_CAPS:SSR_NO/NO4:IC1.7_DRAIN1-1 RECTIFIER:PHASE_SHIFT:IC1.3 RECTIFIER:PHASE_SHIFT:R4.2
GND: 12R_OHMIC_LOAD:C1.1 12R_OHMIC_LOAD:IC1.1 12R_OHMIC_LOAD:IC1.4 12R_OHMIC_LOAD:IC1.7 12R_OHMIC_LOAD:IC2.2 12R_OHMIC_LOAD:IC4.2 12R_OHMIC_LOAD:R1.1 12R_OHMIC_LOAD:R2.1 12R_OHMIC_LOAD:R5.DIE ACCELEROMETER:C1.1 ACCELEROMETER:C2.1 ACCELEROMETER:C4.1 ACCELEROMETER:IC1.1_SCLK ACCELEROMETER:IC1.7_GND ACCELEROMETER:IC1.8_ADC_IN ACCELEROMETER:IC1.11_GND CAN_INFRA:C1.2 CAN_INFRA:C5.2 CAN_INFRA:IC1.P$2 CAN_INFRA:IC2.3 CONN1.1 CONN1.2 CONN1.3 CONN1.4 CONN1.35 CONN1.36 CONN1.37 CONN1.38 CONN1.45 CONN1.46 CONN1.47 CONN1.48 CONN1.97 CONN1.98 CONN1.99 CONN1.100 D1.A FE-RAM:IC1.1 FE-RAM:IC1.2 FE-RAM:IC1.3 FE-RAM:IC1.4 FE-RAM:IC1.7 FE-RAM:IC1.G HUMIDITY_SENSOR:C5.2 HUMIDITY_SENSOR:IC1.VSS IC1.GND INA1:C1.2 INA1:IC3.P$3 INA1:IC3.P$8 INA219:C1.2 INA219:IC3.P$3 INA219:IC3.P$7 INA219:IC3.P$8 RECTIFIER:3V3:C1.2 RECTIFIER:3V3:C2.2 RECTIFIER:3V3:C7.1 RECTIFIER:3V3:IC1.2_GND RECTIFIER:3V3:IC1.3_GND RECTIFIER:3V3:IC2.GND RECTIFIER:GRAETZ+DELON:D2.C RECTIFIER:GRAETZ+DELON:D4.C RECTIFIER:GRAETZ+DELON:DELON:C1.3_NEG RECTIFIER:GRAETZ+DELON:IC1.1 RECTIFIER:GRAETZ+DELON:IC1.2 RECTIFIER:GRAETZ+DELON:IC1.3 RECTIFIER:GRAETZ+DELON:IC1.8 RECTIFIER:GRAETZ+DELON:IC1.17 RECTIFIER:PHASE_SHIFT:C1.1 RECTIFIER:PHASE_SHIFT:IC1.2 RECTIFIER:SMOOTHING_CAP:C1.- RECTIFIER:ZERO-CROSS_DETECTOR:C3.1 RECTIFIER:ZERO-CROSS_DETECTOR:C8.1 RECTIFIER:ZERO-CROSS_DETECTOR:IC3.2 RECTIFIER:ZERO-CROSS_DETECTOR:IC3.4 RECTIFIER:ZERO-CROSS_DETECTOR:R3.1 SD_CARD:IC2.GND1 SD_CARD:IC2.GND2 SD_CARD:IC2.GND3 SD_CARD:IC2.POL STM32F04:C1.1 STM32F04:C4.1 STM32F04:C5.1 STM32F04:C7.1 STM32F04:IC2.16_VSS
I2C_SCL [signal]: 12R_OHMIC_LOAD:IC1.2 ACCELEROMETER:IC1.4_!CS!/SCL FE-RAM:IC1.6 HUMIDITY_SENSOR:IC1.SCL INA1:IC3.P$5 INA219:IC3.P$5 RECTIFIER:GRAETZ+DELON:IC1.14 STM32F04:IC2.3_PF1 STM32F04:R2.1 TP9.P$1
I2C_SDA [signal]: 12R_OHMIC_LOAD:IC1.3 ACCELEROMETER:IC1.2_MOSI/SDA FE-RAM:IC1.5 HUMIDITY_SENSOR:IC1.SDA INA1:IC3.P$6 INA219:IC3.P$6 RECTIFIER:GRAETZ+DELON:IC1.15 STM32F04:IC2.2_PF0 STM32F04:R1.1 TP10.P$1
INA1:IN+L [signal]: INA1:C2.1 INA1:IC3.P$1 INA1:R5.1
INA1:IN-H [signal]: INA1:C2.2 INA1:IC3.P$2 INA1:R3.1
INA219:IN+L [signal]: INA219:C2.1 INA219:IC3.P$1 INA219:R5.1
INA219:IN-H [signal]: INA219:C2.2 INA219:IC3.P$2 INA219:R3.1
LED1: STM32F04:IC2.9_PA3 TP2.P$1
LED2: STM32F04:IC2.8_PA2 TP1.P$1
MISO: SD_CARD:IC2.DAT0 STM32F04:IC2.12_PA6
MOSI: SD_CARD:IC2.CMD STM32F04:IC2.13_PA7
PB3: STM32F04:IC2.24_PB3 TP3.P$1
PB4: STM32F04:IC2.25_PB4 TP4.P$1
PB5: STM32F04:IC2.26_PB5 TP5.P$1
PB6: STM32F04:IC2.27_PB6 TP6.P$1
PB7: STM32F04:IC2.28_PB7 TP7.P$1
PB8: STM32F04:IC2.1_PB8 TP8.P$1
PHASE [signal]: CONN1.15 CONN1.16 RECTIFIER:PHASE_SHIFT:IC1.1 STM32F04:IC2.15_PB1
RECTIFIER:3V3:!EN! [Vdc]: RECTIFIER:3V3:IC1.4_DOUT RECTIFIER:3V3:IC2.EN RECTIFIER:3V3:R1.2
RECTIFIER:3V3:CD [3V3]: RECTIFIER:3V3:C1.1 RECTIFIER:3V3:IC1.5_CD
RECTIFIER:AC [Vdynamo]: RECTIFIER:OVP:D2.A RECTIFIER:PHASE_SHIFT:IC1.4 RECTIFIER:PHASE_SHIFT:R4.1 RECTIFIER:ZERO-CROSS_DETECTOR:R1.1
RECTIFIER:GRAETZ+DELON:!SW1! [3V3]: RECTIFIER:GRAETZ+DELON:IC1.10 RECTIFIER:GRAETZ+DELON:TUNING_CAPS:SSR_NO/NO3:IC1.2_CATHODE1
RECTIFIER:GRAETZ+DELON:!SW2! [3V3]: RECTIFIER:GRAETZ+DELON:IC1.9 RECTIFIER:GRAETZ+DELON:TUNING_CAPS:SSR_NO/NO4:IC1.2_CATHODE1
RECTIFIER:GRAETZ+DELON:!SW_CA! [3V3]: RECTIFIER:GRAETZ+DELON:IC1.7 RECTIFIER:GRAETZ+DELON:TUNING_CAPS:SSR_NO/NO3:IC1.4_CATHODE2 RECTIFIER:GRAETZ+DELON:TUNING_CAPS:SSR_NO/NO4:IC1.4_CATHODE2
RECTIFIER:GRAETZ+DELON:!SW_CB! [3V3]: RECTIFIER:GRAETZ+DELON:IC1.6 RECTIFIER:GRAETZ+DELON:TUNING_CAPS:SSR_NO/NO1:IC1.2_CATHODE1 RECTIFIER:GRAETZ+DELON:TUNING_CAPS:SSR_NO/NO2:IC1.2_CATHODE1
RECTIFIER:GRAETZ+DELON:!SW_CC! [3V3]: RECTIFIER:GRAETZ+DELON:IC1.5 RECTIFIER:GRAETZ+DELON:TUNING_CAPS:SSR_NO/NO1:IC1.4_CATHODE2 RECTIFIER:GRAETZ+DELON:TUNING_CAPS:SSR_NO/NO2:IC1.4_CATHODE2
RECTIFIER:GRAETZ+DELON:!SW_CD! [3V3]: RECTIFIER:GRAETZ+DELON:DELON:SSR_NO/NO3:IC1.2_CATHODE1 RECTIFIER:GRAETZ+DELON:IC1.4
RECTIFIER:GRAETZ+DELON:DELON [Vac]: RECTIFIER:GRAETZ+DELON:DELON:SSR_NO/NO3:IC1.8_DRAIN1-2 RECTIFIER:GRAETZ+DELON:TUNING_CAPS:SSR_NO/NO2:IC1.6_DRAIN2-2 RECTIFIER:GRAETZ+DELON:TUNING_CAPS:SSR_NO/NO2:IC1.8_DRAIN1-2 RECTIFIER:GRAETZ+DELON:TUNING_CAPS:SSR_NO/NO3:IC1.7_DRAIN1-1 RECTIFIER:GRAETZ+DELON:TUNING_CAPS:SSR_NO/NO4:IC1.6_DRAIN2-2 RECTIFIER:GRAETZ+DELON:TUNING_CAPS:SSR_NO/NO4:IC1.8_DRAIN1-2
RECTIFIER:GRAETZ+DELON:DELON:SSR_NO/NO3:SW2_CAT [3V3]: RECTIFIER:GRAETZ+DELON:DELON:SSR_NO/NO3:IC1.4_CATHODE2
RECTIFIER:GRAETZ+DELON:DELON:SSR_NO/NO3:SW2_IN [BAT+]: RECTIFIER:GRAETZ+DELON:DELON:SSR_NO/NO3:IC1.6_DRAIN2-2
RECTIFIER:GRAETZ+DELON:DELON:SSR_NO/NO3:SW2_OUT [BAT+]: RECTIFIER:GRAETZ+DELON:DELON:SSR_NO/NO3:IC1.5_DRAIN2-1
RECTIFIER:GRAETZ+DELON:DELON:SW1_OUT [Vac]: RECTIFIER:GRAETZ+DELON:DELON:C1.2_MID RECTIFIER:GRAETZ+DELON:DELON:SSR_NO/NO3:IC1.7_DRAIN1-1
RECTIFIER:GRAETZ+DELON:SSR_ANODE [3V3]: RECTIFIER:GRAETZ+DELON:DELON:SSR_NO/NO3:IC1.1_ANODE1 RECTIFIER:GRAETZ+DELON:DELON:SSR_NO/NO3:IC1.3_ANODE2 RECTIFIER:GRAETZ+DELON:R1.1 RECTIFIER:GRAETZ+DELON:TUNING_CAPS:SSR_NO/NO1:IC1.1_ANODE1 RECTIFIER:GRAETZ+DELON:TUNING_CAPS:SSR_NO/NO1:IC1.3_ANODE2 RECTIFIER:GRAETZ+DELON:TUNING_CAPS:SSR_NO/NO2:IC1.1_ANODE1 RECTIFIER:GRAETZ+DELON:TUNING_CAPS:SSR_NO/NO2:IC1.3_ANODE2 RECTIFIER:GRAETZ+DELON:TUNING_CAPS:SSR_NO/NO3:IC1.1_ANODE1 RECTIFIER:GRAETZ+DELON:TUNING_CAPS:SSR_NO/NO3:IC1.3_ANODE2 RECTIFIER:GRAETZ+DELON:TUNING_CAPS:SSR_NO/NO4:IC1.1_ANODE1 RECTIFIER:GRAETZ+DELON:TUNING_CAPS:SSR_NO/NO4:IC1.3_ANODE2
RECTIFIER:GRAETZ+DELON:TUNING_CAPS:CAA [Vac]: RECTIFIER:GRAETZ+DELON:TUNING_CAPS:C2.1_C RECTIFIER:GRAETZ+DELON:TUNING_CAPS:SSR_NO/NO3:IC1.5_DRAIN2-1
RECTIFIER:GRAETZ+DELON:TUNING_CAPS:CAB [Vac]: RECTIFIER:GRAETZ+DELON:TUNING_CAPS:C2.3_C RECTIFIER:GRAETZ+DELON:TUNING_CAPS:SSR_NO/NO4:IC1.5_DRAIN2-1
RECTIFIER:GRAETZ+DELON:TUNING_CAPS:CBA [Vac]: RECTIFIER:GRAETZ+DELON:TUNING_CAPS:C3.1_C RECTIFIER:GRAETZ+DELON:TUNING_CAPS:SSR_NO/NO1:IC1.7_DRAIN1-1
RECTIFIER:GRAETZ+DELON:TUNING_CAPS:CBB [Vac]: RECTIFIER:GRAETZ+DELON:TUNING_CAPS:C3.3_C RECTIFIER:GRAETZ+DELON:TUNING_CAPS:SSR_NO/NO2:IC1.7_DRAIN1-1
RECTIFIER:GRAETZ+DELON:TUNING_CAPS:CCA [Vac]: RECTIFIER:GRAETZ+DELON:TUNING_CAPS:C4.1_C RECTIFIER:GRAETZ+DELON:TUNING_CAPS:SSR_NO/NO1:IC1.5_DRAIN2-1
RECTIFIER:GRAETZ+DELON:TUNING_CAPS:CCB [Vac]: RECTIFIER:GRAETZ+DELON:TUNING_CAPS:C4.3_C RECTIFIER:GRAETZ+DELON:TUNING_CAPS:SSR_NO/NO2:IC1.5_DRAIN2-1
RECTIFIER:GRAETZ+DELON:TUNING_CAPS:TUNING_CAP_BIAS [Vac]: RECTIFIER:GRAETZ+DELON:TUNING_CAPS:C2.2_MID RECTIFIER:GRAETZ+DELON:TUNING_CAPS:C3.2_MID RECTIFIER:GRAETZ+DELON:TUNING_CAPS:C4.2_MID RECTIFIER:GRAETZ+DELON:TUNING_CAPS:R2.1
RECTIFIER:LDO_IN [BAT+]: RECTIFIER:3V3:C2.1 RECTIFIER:3V3:IC1.1_VDD RECTIFIER:3V3:IC2.IN RECTIFIER:3V3:R1.1 RECTIFIER:D1.C RECTIFIER:D2.C
RECTIFIER:OVP:ZENER_COMMON [Vdynamo]: RECTIFIER:OVP:D1.C RECTIFIER:OVP:D2.C
RECTIFIER:SMOOTHINGCAP_IN [Vac]: RECTIFIER:GRAETZ+DELON:D1.A RECTIFIER:GRAETZ+DELON:D3.A RECTIFIER:GRAETZ+DELON:DELON:C1.1_POS RECTIFIER:GRAETZ+DELON:TUNING_CAPS:R2.2 RECTIFIER:SMOOTHING_CAP:D8.C
RECTIFIER:ZERO-CROSS_DETECTOR:COMPARATOR_OUT [signal]: RECTIFIER:ZERO-CROSS_DETECTOR:IC1.2 RECTIFIER:ZERO-CROSS_DETECTOR:IC3.1
RECTIFIER:ZERO-CROSS_DETECTOR:OPAMP_IN- [Vdynamo]: RECTIFIER:ZERO-CROSS_DETECTOR:C8.2 RECTIFIER:ZERO-CROSS_DETECTOR:IC3.3 RECTIFIER:ZERO-CROSS_DETECTOR:R1.2
RECTIFIER:ZERO-CROSS_DETECTOR:OPTO-ANODE [signal]: RECTIFIER:ZERO-CROSS_DETECTOR:IC1.1 RECTIFIER:ZERO-CROSS_DETECTOR:R2.1
SYS_NRST [signal]: CONN1.27 CONN1.28 IC1.I1 STM32F04:C7.2 STM32F04:IC2.4_NRST
SYS_SWCLK [signal]: CONN1.29 CONN1.30 IC1.I2 STM32F04:IC2.22_PA14
SYS_SWDIO [signal]: CONN1.31 CONN1.32 IC1.I3 STM32F04:IC2.21_PA13
VDC [Vdc]: CONN1.61 CONN1.62 CONN1.63 CONN1.64 CONN1.65 CONN1.66 INA219:R4.1 INA219:R5.2 RECTIFIER:D2.A RECTIFIER:SMOOTHING_CAP:C1.+ RECTIFIER:SMOOTHING_CAP:D8.A
ZEROCROSS [signal]: CONN1.13 CONN1.14 IC1.I4 RECTIFIER:ZERO-CROSS_DETECTOR:IC1.4 RECTIFIER:ZERO-CROSS_DETECTOR:R3.2 STM32F04:IC2.14_PB0